# EAGLE board Power systems board (EAGLE 8.7.0)
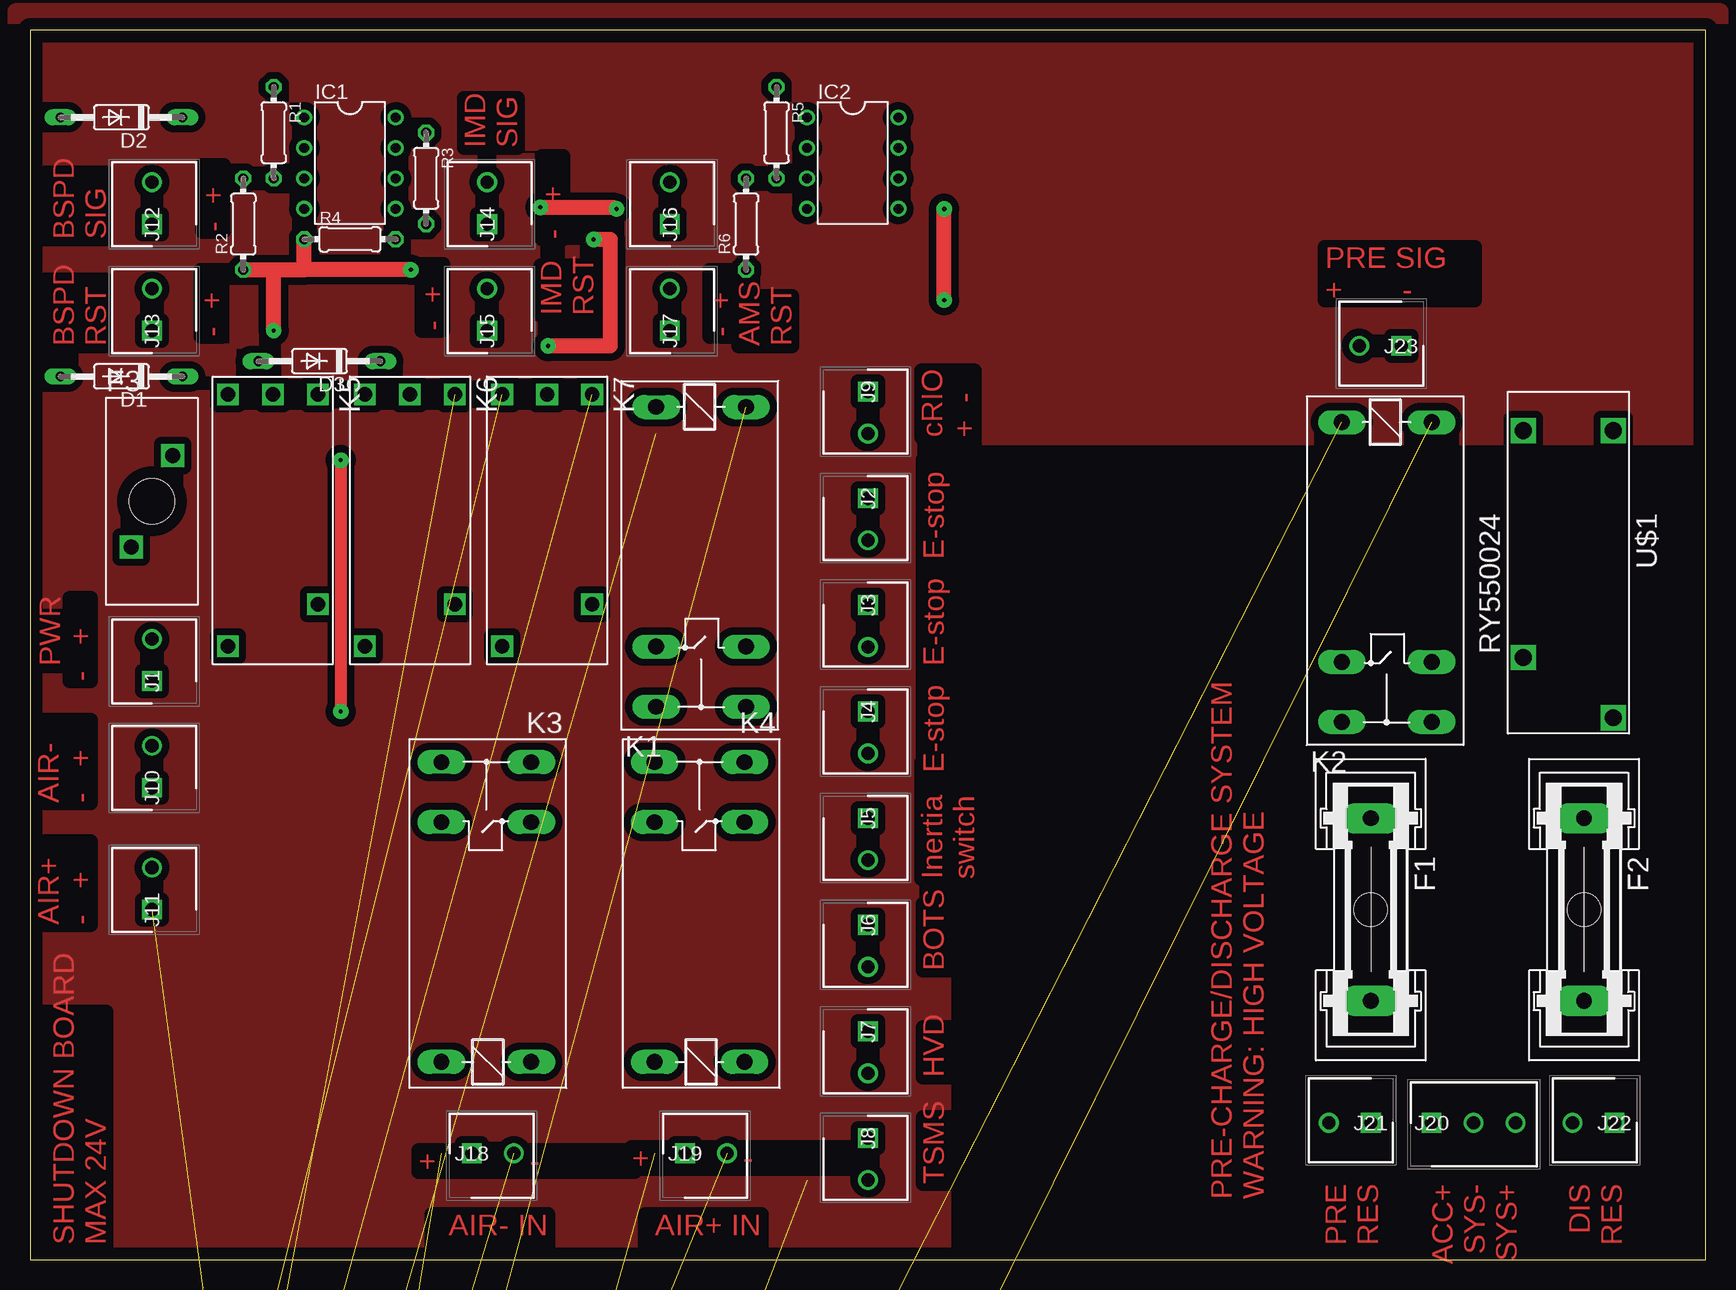
[diagram p0: board, top side]
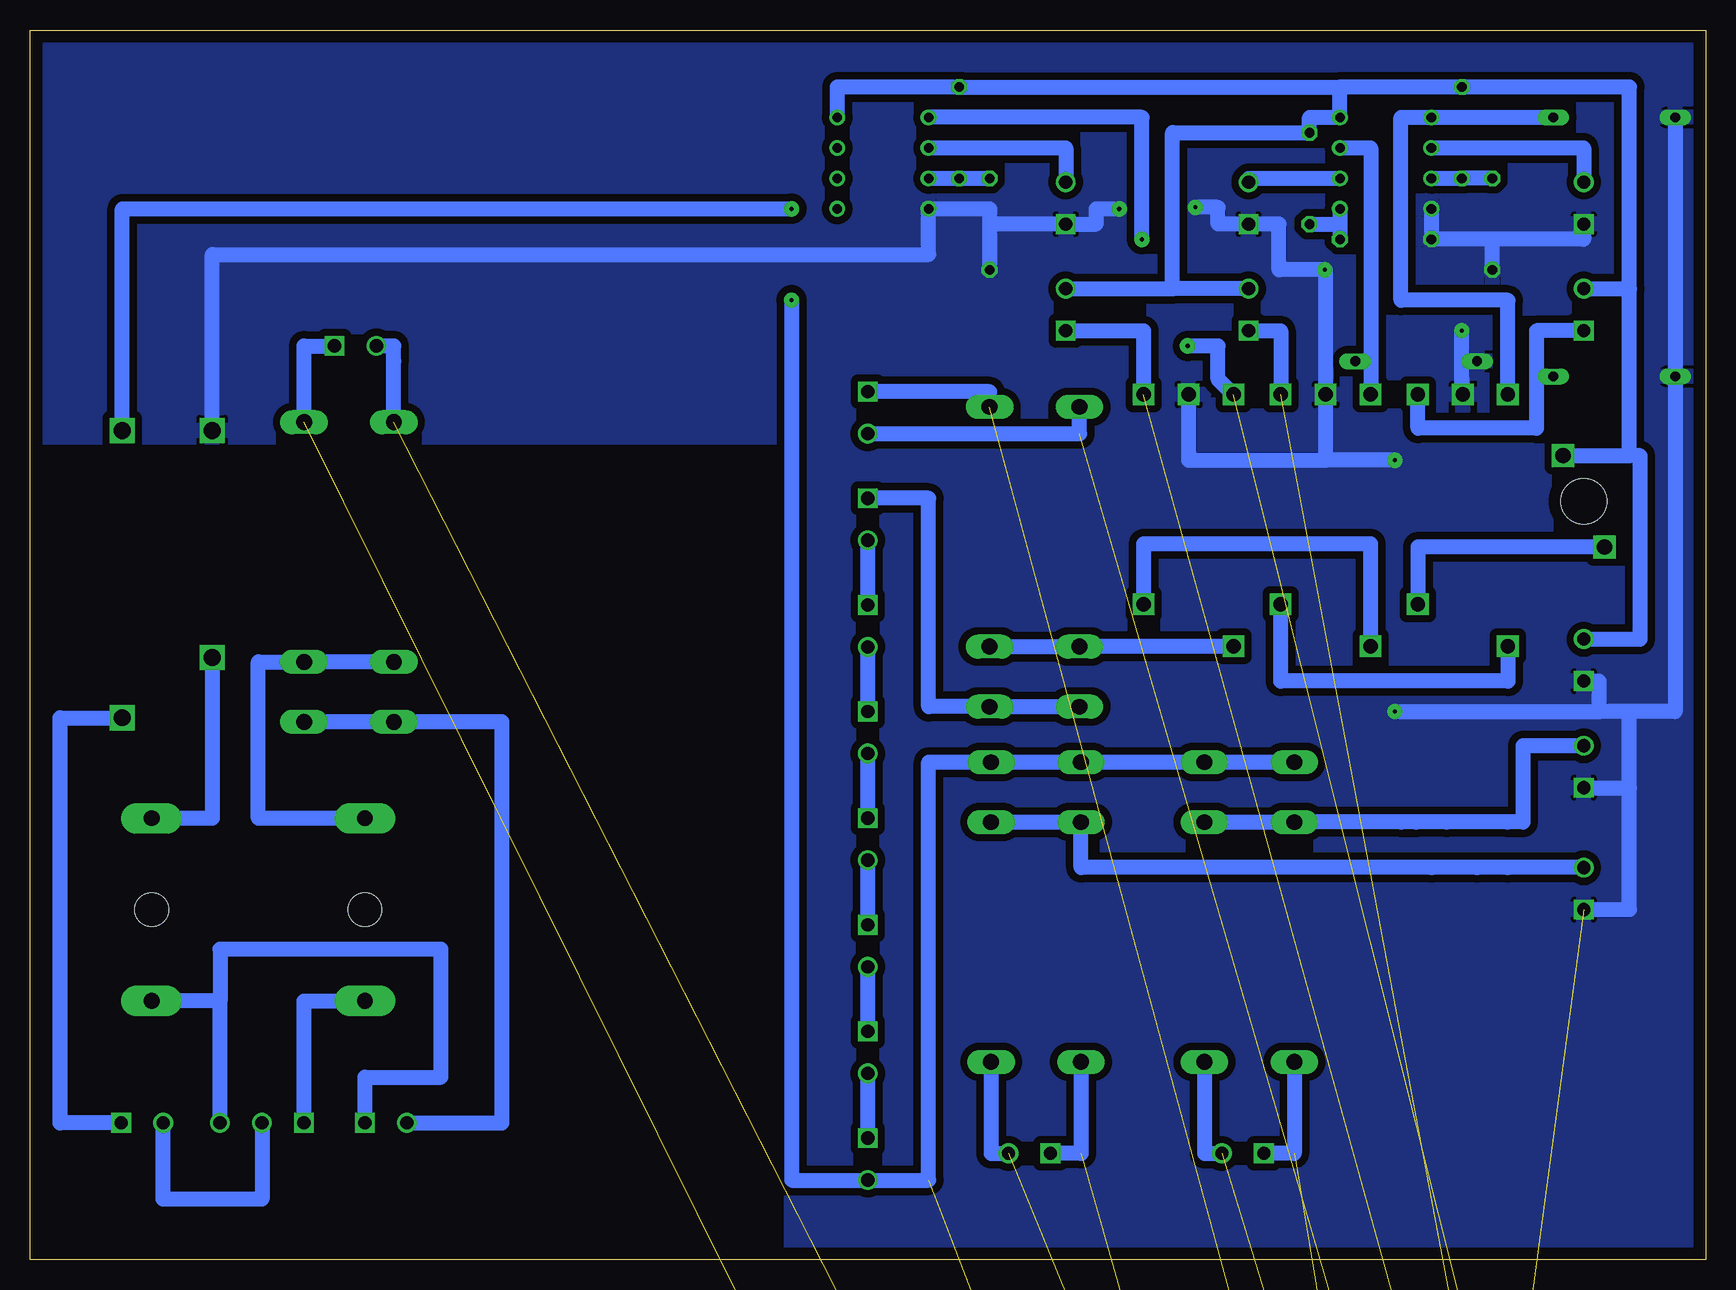
[diagram p1: board, bottom side, seen from below]

Size 139.68 x 102.54 mm. Coordinates in mm from the lower left corner, seen from the top.
Outline: 0,0 139.68,0 139.68,102.54 0,102.54 0,0
Copper layers (1*16): Top 0.035mm / dielectric 1.5mm / Bottom 0.035mm
Design rules "default *": minimum track width 6mil, minimum drill 0.35mm, track to track 24mil, track to pad 24mil, pad to pad 24mil, via to via 24mil, smd to smd 24mil, copper to edge 40mil, drill to drill 6mil, minimum pad ring 10mil, minimum via ring 8mil, stop-mask expansion 4mil, vias tented up to drill 0mil, thermal gap 10mil

## Footprints (pad centres in the part's own frame; a part is rotated, then mirrored left to right if it is on the bottom)
DO35-10 = drill 0.813 long: A 5.08,0; C -5.08,0
GSH15 = drill 1.321 pad 2.54 long: 1 -7.62,0; 2 7.62,0 | hole 2.794: 0,0
01530008Z = drill 1.27 square: P$1 5.537,12.446; P$2 2.083,4.826 | hole 3.785: 3.81,8.636
DIL08 = drill 0.813 pad 1.27: 1 -3.81,-3.81; 2 -1.27,-3.81; 3 1.27,-3.81; 4 3.81,-3.81; 5 3.81,3.81; 6 1.27,3.81; 7 -1.27,3.81; 8 -3.81,3.81
SHDR2W90P0X350_1X2_700X700X850 = drill 1.1 pad 1.65 square: 1 0,0 | drill 1.1 pad 1.65: 2 3.5,0
SHDR3W90P0X350_1X3_1050X700X85 = drill 1.1 pad 1.65 square: 1 0,0 | drill 1.1 pad 1.65: 2 3.5,0; 3 7,0
G2REA = drill 1.321 long: 1 -2.54,-3.683; 2 -2.54,3.81; P 17.45,-3.683; P@ 17.45,3.81; S 22.454,-3.683; S@ 22.454,3.81
ADW1224HLW = drill 1.2 square: 3 22.5,1.25; 5 19,8.75; +7 1.5,5; -1 1.5,8.75; -6 1.5,1.25
0204/7 = drill 0.813 octagon: 1 -3.81,0; 2 3.81,0
RY550024 = drill 1.4 square: 1 3.25,1.3; 2 3.25,8.8; 11 22.15,1.3; 12 27.19,8.8

## Placement (x,y rotation side)
D1  1N4446  [DO35-10]  7.62,73.66 180 top
D2  1N4446  [DO35-10]  7.62,95.25 180 top
D3  1N4446  [DO35-10]  24.13,74.93 180 top
D4  1N4446  [DO35-10]  16.51,-55.88 0 top  (outside the outline)
D5  1N4446  [DO35-10]  10.16,-64.77 0 top  (outside the outline)
D6  1N4446  [DO35-10]  10.16,-78.74 0 top  (outside the outline)
D7  1N4446  [DO35-10]  10.16,-92.71 0 top  (outside the outline)
D8  1N4446  [DO35-10]  10.16,-106.68 0 top  (outside the outline)
D9  1N4446  [DO35-10]  10.16,-120.65 0 top  (outside the outline)
D10  1N4446  [DO35-10]  10.16,-134.62 0 top  (outside the outline)
D11  1N4446  [DO35-10]  10.16,-148.59 0 top  (outside the outline)
F1  [GSH15]  111.76,29.21 270 top
F2  [GSH15]  129.54,29.21 270 top
F3  01530008Z  [01530008Z]  6.35,54.61 0 top
IC1  LM358N  [DIL08]  26.67,91.44 270 top
IC2  LM358N  [DIL08]  68.58,91.44 270 top
J1  8971332  [SHDR2W90P0X350_1X2_700X700X850]  10.16,48.26 90 top
J2  8971332  [SHDR2W90P0X350_1X2_700X700X850]  69.85,63.5 270 top
J3  8971332  [SHDR2W90P0X350_1X2_700X700X850]  69.85,54.61 270 top
J4  8971332  [SHDR2W90P0X350_1X2_700X700X850]  69.85,45.72 270 top
J5  8971332  [SHDR2W90P0X350_1X2_700X700X850]  69.85,36.83 270 top
J6  8971332  [SHDR2W90P0X350_1X2_700X700X850]  69.85,27.94 270 top
J7  8971332  [SHDR2W90P0X350_1X2_700X700X850]  69.85,19.05 270 top
J8  8971332  [SHDR2W90P0X350_1X2_700X700X850]  69.85,10.16 270 top
J9  8971332  [SHDR2W90P0X350_1X2_700X700X850]  69.85,72.39 270 top
J10  8971332  [SHDR2W90P0X350_1X2_700X700X850]  10.16,39.37 90 top
J11  8971332  [SHDR2W90P0X350_1X2_700X700X850]  10.16,29.21 90 top
J12  8971332  [SHDR2W90P0X350_1X2_700X700X850]  10.16,86.36 90 top
J13  8971332  [SHDR2W90P0X350_1X2_700X700X850]  10.16,77.47 90 top
J14  8971332  [SHDR2W90P0X350_1X2_700X700X850]  38.1,86.36 90 top
J15  8971332  [SHDR2W90P0X350_1X2_700X700X850]  38.1,77.47 90 top
J16  8971332  [SHDR2W90P0X350_1X2_700X700X850]  53.34,86.36 90 top
J17  8971332  [SHDR2W90P0X350_1X2_700X700X850]  53.34,77.47 90 top
J18  8971332  [SHDR2W90P0X350_1X2_700X700X850]  36.83,8.89 0 top
J19  8971332  [SHDR2W90P0X350_1X2_700X700X850]  54.61,8.89 0 top
J20  8971335  [SHDR3W90P0X350_1X3_1050X700X85]  116.84,11.43 0 top
J21  8971332  [SHDR2W90P0X350_1X2_700X700X850]  111.76,11.43 180 top
J22  8971332  [SHDR2W90P0X350_1X2_700X700X850]  132.08,11.43 180 top
J23  8971332  [SHDR2W90P0X350_1X2_700X700X850]  114.3,76.2 180 top
K1  G2REA  [G2REA]  55.88,68.58 270 top
K2  G2REA  [G2REA]  113.03,67.31 270 top
K3  G2REA  [G2REA]  38.1,19.05 90 top
K4  G2REA  [G2REA]  55.88,19.05 90 top
K5  ADW1224HLW  [ADW1224HLW]  15.24,73.66 270 top
K6  ADW1224HLW  [ADW1224HLW]  26.67,73.66 270 top
K7  ADW1224HLW  [ADW1224HLW]  38.1,73.66 270 top
R1  68k  [0204/7]  20.32,93.98 270 top
R2  10k  [0204/7]  17.78,86.36 90 top
R3  68k  [0204/7]  33.02,90.17 270 top
R4  10k  [0204/7]  26.67,85.09 0 top
R5  68k  [0204/7]  62.23,93.98 270 top
R6  10k  [0204/7]  59.69,86.36 90 top
U$1  RY550024  [RY550024]  123.19,72.39 270 top

## Library data of the parts
D1-D11 = diode
F1 F2 = fuse; MPN: 64900001039; OC_FARNELL: 1271673; OC_NEWARK: 02P0318
F3 = 01530008
IC1 = linear; SPICEPREFIX: J
IC2 = linear
J1-J19 J21-J23 = SamacSys_Parts; ARROW_PART_NUMBER: 8971332; ARROW_PRICE/STOCK: http://uk.rs-online.com/web/p/products/8971332; DESCRIPTION: RS Pro 3.5mm Pitch Straight PCB Terminal Block with Screw Termination, PCB Mount, 2 Way; HEIGHT: 8.5mm; MANUFACTURER_NAME: RS Components; MANUFACTURER_PART_NUMBER: 8971332; RS_PART_NUMBER: 8971332; RS_PRICE/STOCK: http://uk.rs-online.com/web/p/products/8971332
J20 = SamacSys_Parts; DESCRIPTION: 3.5mm U/low prof PCB terminal block,3P; HEIGHT: 8.5mm; MANUFACTURER_NAME: RS Components; MANUFACTURER_PART_NUMBER: 8971335; RS_PART_NUMBER: 8971335
K1-K4 = relay; OC_FARNELL: unknown; OC_NEWARK: unknown
K5-K7 = ADW1224HLW
R1-R6 = rcl; SPICEPREFIX: R
U$1 = RY550024

## Nets
+24V: F3.P$1 IC1.8 IC2.8 J1.2 J13.2 J15.2 J17.2 R1.1 R3.1 R5.1
GND: D1.A D2.A D3.A D4.A D5.A D6.A D11.A IC1.4 IC2.4 J1.1 J10.1 J11.1 J12.1 J14.1 J16.1 K5.+7 K6.+7 K7.+7 R2.1 R4.1 R6.1 U$1.1
N$1: IC1.3 R1.2 R2.2
N$2: K5.3 K6.5
N$3: K6.3 K7.5
N$4: K1.P K1.P@ K7.3
N$5: J2.1 K1.S K1.S@
N$6: J2.2 J3.1
N$7: J3.2 J4.1
N$8: J4.2 J5.1
N$9: J5.2 J6.1
N$10: J6.2 J7.1
N$11: J7.2 J8.1
N$12: D11.C J8.2 K3.S K3.S@ K4.S K4.S@ U$1.2
N$13: J10.2 K3.P K3.P@
N$14: J11.2 K4.P K4.P@
N$15: F1.1 K2.P K2.P@
N$16: D2.C IC1.1 K5.-6
N$17: IC1.2 J12.2
N$18: D1.C J13.1 K5.-1
N$19: IC1.5 R3.2 R4.2
N$20: IC1.6 J14.2
N$21: D5.C IC2.1 K7.-6
N$22: D4.C J15.1 K6.-1
N$23: D3.C IC1.7 K6.-6
N$24: D7.C J9.2 K1.1
N$25: IC2.2 J16.2
N$26: IC2.3 R5.2 R6.2
N$27: D7.A J9.1 K1.2
N$28: D6.C J17.1 K7.-1
N$29: D8.C J18.2 K3.1
N$30: D8.A J18.1 K3.2
N$31: D9.C J19.2 K4.1
N$32: D9.A J19.1 K4.2
N$33: F1.2 J20.1
N$34: F2.2 J20.3 J21.1
N$35: J21.2 K2.S K2.S@
N$36: J20.2 J22.2
N$37: D10.C J23.2 K2.1
N$38: D10.A J23.1 K2.2
N$39: F3.P$2 K5.5
N$40: F2.1 U$1.11
N$41: J22.1 U$1.12

## Tracks (layer width: path | path; a pad name or v marks a point on that pad's centre or on a via)
+24V
  Bottom 1.27: 30.48,97.79 R1.1 6.35,97.79 6.35,80.97 | 30.48,97.79 IC1.8 33.02,95.25 R3.1 44.45,93.98 44.45,80.97 | J13.2 6.35,80.97 | F3.P$1 6.35,67.06 | 6.35,67.06 6.35,80.97 | J1.2 5.46,51.76 5.46,67.06 6.35,67.06 | J15.2 44.45,80.97 | IC2.8 72.39,97.79 R5.1 30.48,97.79 | J17.2 44.45,80.97
GND  (via drill 0.35 pad 1.27)  (4 unrouted)
  Top 1.016: v25.91,66.67 v25.91,45.72
  Top 1.27: v31.75,82.55 22.86,82.55 | 22.86,82.55 R4.1 | R2.1 20.32,82.55 | 20.32,82.55 22.86,82.55 | v20.32,77.47 20.32,82.55 | v42.55,87.76 48.64,87.76 v48.9,87.63
  Bottom 1.27: R2.1 17.78,85.09 | 17.78,85.09 R4.1 IC1.4 | J12.1 10.16,85.09 17.78,85.09 | K5.+7 20.32,73.43 20.32,74.93 | 20.32,74.93 v20.32,77.47 | v25.91,66.67 31.67,66.67 | 31.67,66.67 K6.+7 31.67,82.55 v31.75,82.55 35.56,82.55 35.56,86.36 J14.1 40.64,86.36 40.64,87.76 v42.55,87.76 | K7.+7 43.1,66.67 31.67,66.67 | 59.69,86.36 59.69,87.63 IC2.4 64.77,83.82 124.49,83.82 U$1.1 | 59.69,86.36 R6.1 | 59.69,86.36 J16.1 50.8,86.36 50.8,87.63 v48.9,87.63 | J1.1 8.89,48.26 8.89,45.72 | v25.91,45.72 8.89,45.72 | J10.1 6.35,39.37 | 6.35,39.37 6.35,45.72 | 6.35,45.72 8.89,45.72 | J11.1 6.35,29.21 6.35,39.37 | D2.A D1.A 2.54,45.72 6.35,45.72 | D3.A 20.32,74.93
  pour Bottom: 76.2,-1.27 76.2,68.58 140.97,68.58 140.97,104.14 -1.27,104.14 -1.27,-1.27
GND1
  pour Top: 76.2,-1.27 76.2,68.58 140.97,68.58 140.97,104.14 -1.27,104.14 -1.27,-1.27
N$1
  Bottom 1.27: R2.2 R1.2 IC1.3
N$2
  Bottom 1.27: K5.3 16.49,48.26 35.42,48.26 K6.5
N$3
  Bottom 1.27: K6.3 27.92,59.69 46.85,59.69 K7.5
N$4
  Bottom 1.27: K1.P@ K1.P 50.93,51.16 K7.3
N$5
  Bottom 1.27: K1.S K1.S@ 64.77,46.13 64.77,63.5 J2.1
N$6
  Bottom 1.27: J2.2 69.85,57.15 J3.1
N$7
  Bottom 1.27: J3.2 69.85,49.53 J4.1
N$8
  Bottom 1.27: J4.2 69.85,39.37 J5.1
N$9
  Bottom 1.27: J5.2 69.85,30.48 J6.1
N$10
  Bottom 1.27: J6.2 J7.1
N$11
  Bottom 1.27: J7.2 J8.1
N$12  (via drill 0.35 pad 1.27)  (1 unrouted)
  Top 1.27: v76.2,80.01 v76.2,87.63
  Bottom 1.27: K3.S@ K3.S K4.S@ K4.S 64.77,41.5 64.77,6.66 J8.2 76.2,6.66 v76.2,80.01 | U$1.2 131.99,87.63 v76.2,87.63
N$13
  Bottom 1.27: K3.P K3.P@ 25.4,36.5 24.13,36.5 21.59,36.5 16.51,36.5 15.24,36.5 15.24,39.37 15.24,42.87 J10.2
N$14
  Bottom 1.27: K4.P K4.P@ 52.07,32.71 22.86,32.71 19.05,32.71 16.51,32.71 J11.2
N$15
  Bottom 1.27: F1.1 120.65,36.83 120.65,49.86 K2.P@ K2.P
N$16
  Bottom 1.27: K5.-6 16.49,80.01 25.4,80.01 25.4,95.25 IC1.1 D2.C
N$17
  Bottom 1.27: IC1.2 10.16,92.71 J12.2
N$18
  Bottom 1.27: J13.1 14.1,77.47 14.1,73.66 | K5.-1 23.99,69.34 14.1,69.34 14.1,73.66 | D1.C 14.1,73.66
N$19
  Bottom 1.27: IC1.5 30.48,86.36 | 30.48,86.36 R4.2 | R3.2 30.48,86.36
N$20
  Bottom 1.27: J14.2 38.1,90.17 36.83,90.17 35.56,90.17 IC1.6
N$21  (via drill 0.35 pad 1.27)  (1 unrouted)
  Top 1.27: v43.18,76.2 48.37,76.2 48.37,85.09 v46.99,85.09
  Bottom 1.27: K7.-6 40.64,73.43 40.64,76.2 v43.18,76.2 | v46.99,85.09 46.99,95.25 IC2.1
N$22  (1 unrouted)
  Bottom 1.27: J15.1 35.42,77.47 K6.-1
N$23
  Bottom 1.27: IC1.7 27.92,92.71 27.92,74.93 | 27.92,74.93 K6.-6 | D3.C 27.92,74.93
N$24  (1 unrouted)
  Bottom 1.27: J9.2 52.2,68.89 K1.1
N$25
  Bottom 1.27: IC2.2 53.34,92.71 J16.2
N$26
  Bottom 1.27: IC2.3 R5.2 R6.2
N$27  (1 unrouted)
  Bottom 1.27: K1.2 59.69,72.39 J9.1
N$28  (1 unrouted)
  Bottom 1.27: J17.1 46.85,77.47 K7.-1
N$29  (1 unrouted)
  Bottom 1.27: K3.1 41.78,8.89 J18.2
N$30  (1 unrouted)
  Bottom 1.27: K3.2 34.29,8.89 J18.1
N$31  (1 unrouted)
  Bottom 1.27: K4.1 59.56,8.89 J19.2
N$32  (1 unrouted)
  Bottom 1.27: K4.2 52.07,8.89 J19.1
N$33
  Bottom 1.27: J20.1 116.84,21.59 F1.2
N$34
  Bottom 1.27: J20.3 123.84,21.59 | 123.84,21.59 F2.2 | J21.1 111.76,12.7 111.76,15.24 105.41,15.24 105.41,25.91 123.84,25.91 123.84,21.59
N$35
  Bottom 1.27: K2.S@ K2.S 100.33,44.86 100.33,11.43 J21.2
N$36
  Bottom 1.27: J20.2 120.34,5.08 128.58,5.08 J22.2
N$37  (1 unrouted)
  Bottom 1.27: K2.1 109.35,74.93 109.35,76.2 J23.2
N$38  (1 unrouted)
  Bottom 1.27: K2.2 116.84,73.66 116.84,76.2 J23.1
N$39
  Bottom 1.27: F3.P$2 23.99,59.44 K5.5
N$40
  Bottom 1.27: U$1.11 124.49,36.83 F2.1
N$41
  Bottom 1.27: J22.1 137.16,11.43 137.16,45.2 U$1.12

## Text on the board
Top: IMD / SIG | - + | BSPD / SIG | - + | PRE SIG / + - | IMD / RST | - + | - + | - + | BSPD / RST | AMS / RST | cRIO / + - | E-stop | PWR | E-stop | - + | E-stop | AIR- / - + | Inertia / switch | AIR+ / - + | BOTS | HVD | + - | + - | TSMS | PRE / RES | ACC+ / SYS- / SYS+ | DIS / RES | PRE-CHARGE/DISCHARGE SYSTEM / WARNING: HIGH VOLTAGE | AIR- IN | AIR+ IN | SHUTDOWN BOARD / MAX 24V